# Altium PCB King Shape PCB.PcbDoc
Units mil, origin at the board's own origin, x right, y up, seen from the top; angles counter-clockwise.
Board outline 5273.33 x 2627.77 mil, 2 copper layers (Top Layer, Bottom Layer); 14 components, 8 nets, 33 pads, 11 vias.
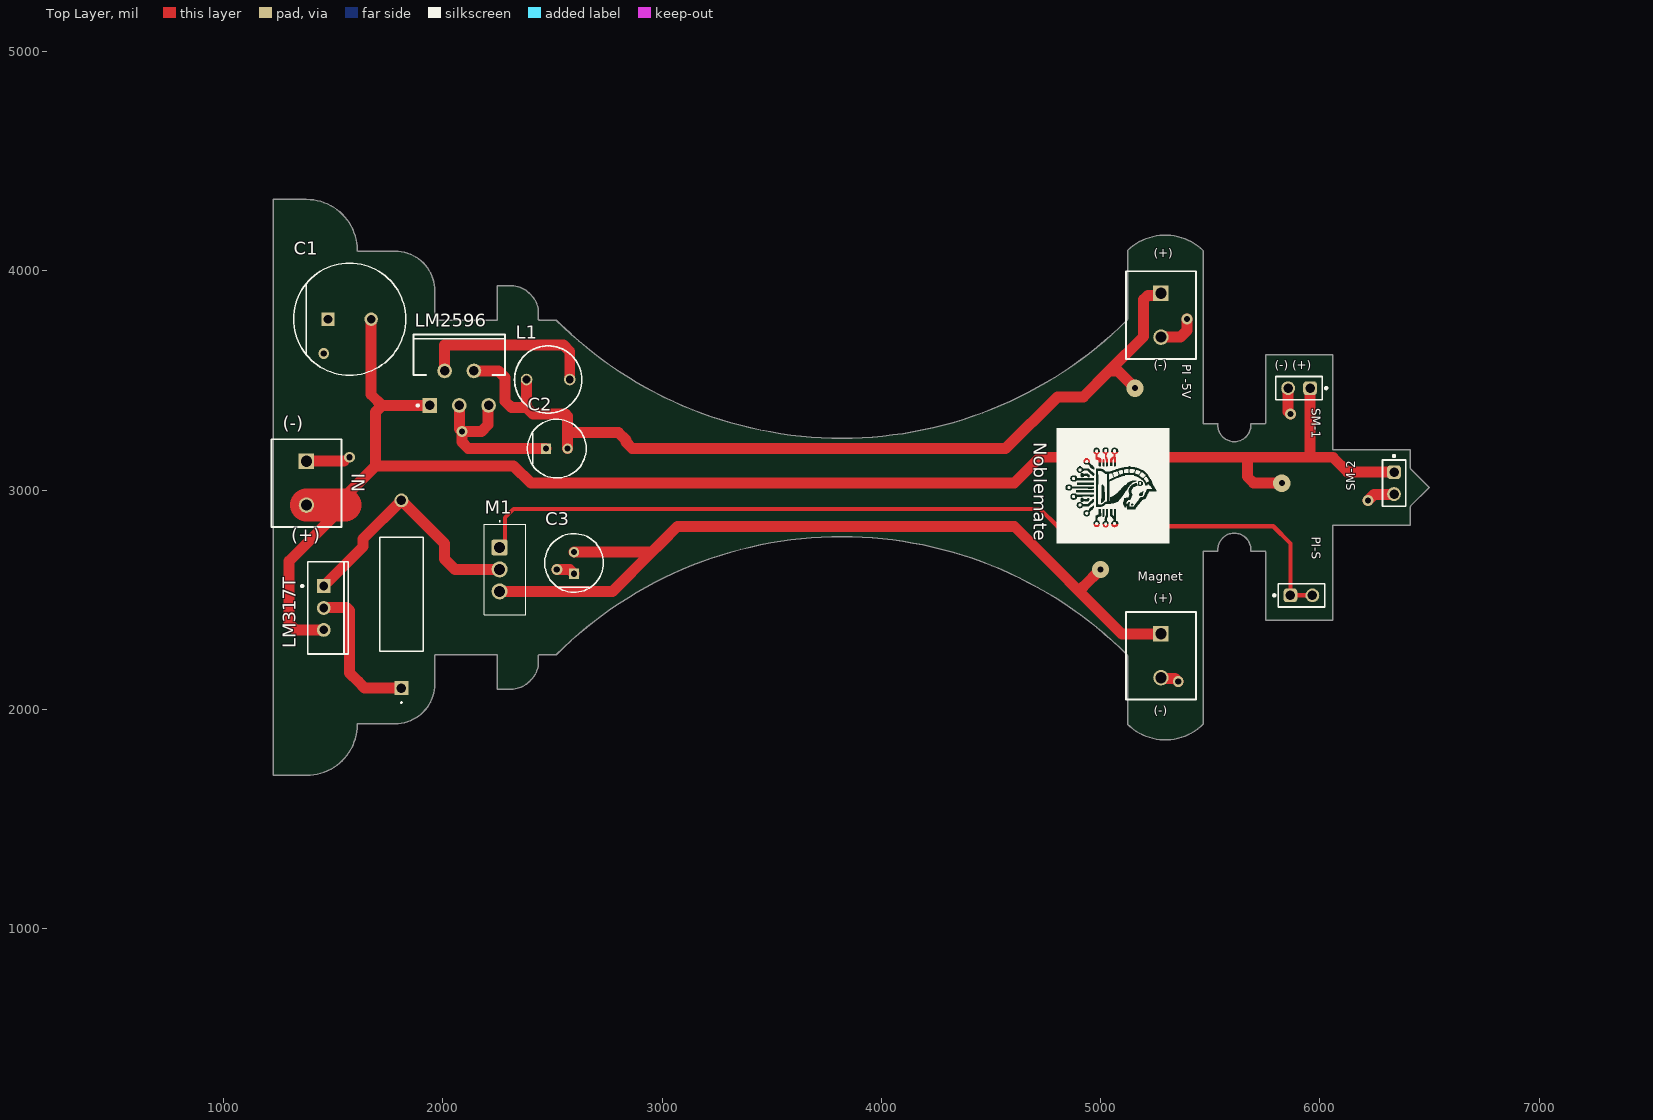
[diagram p0: Top Layer view]
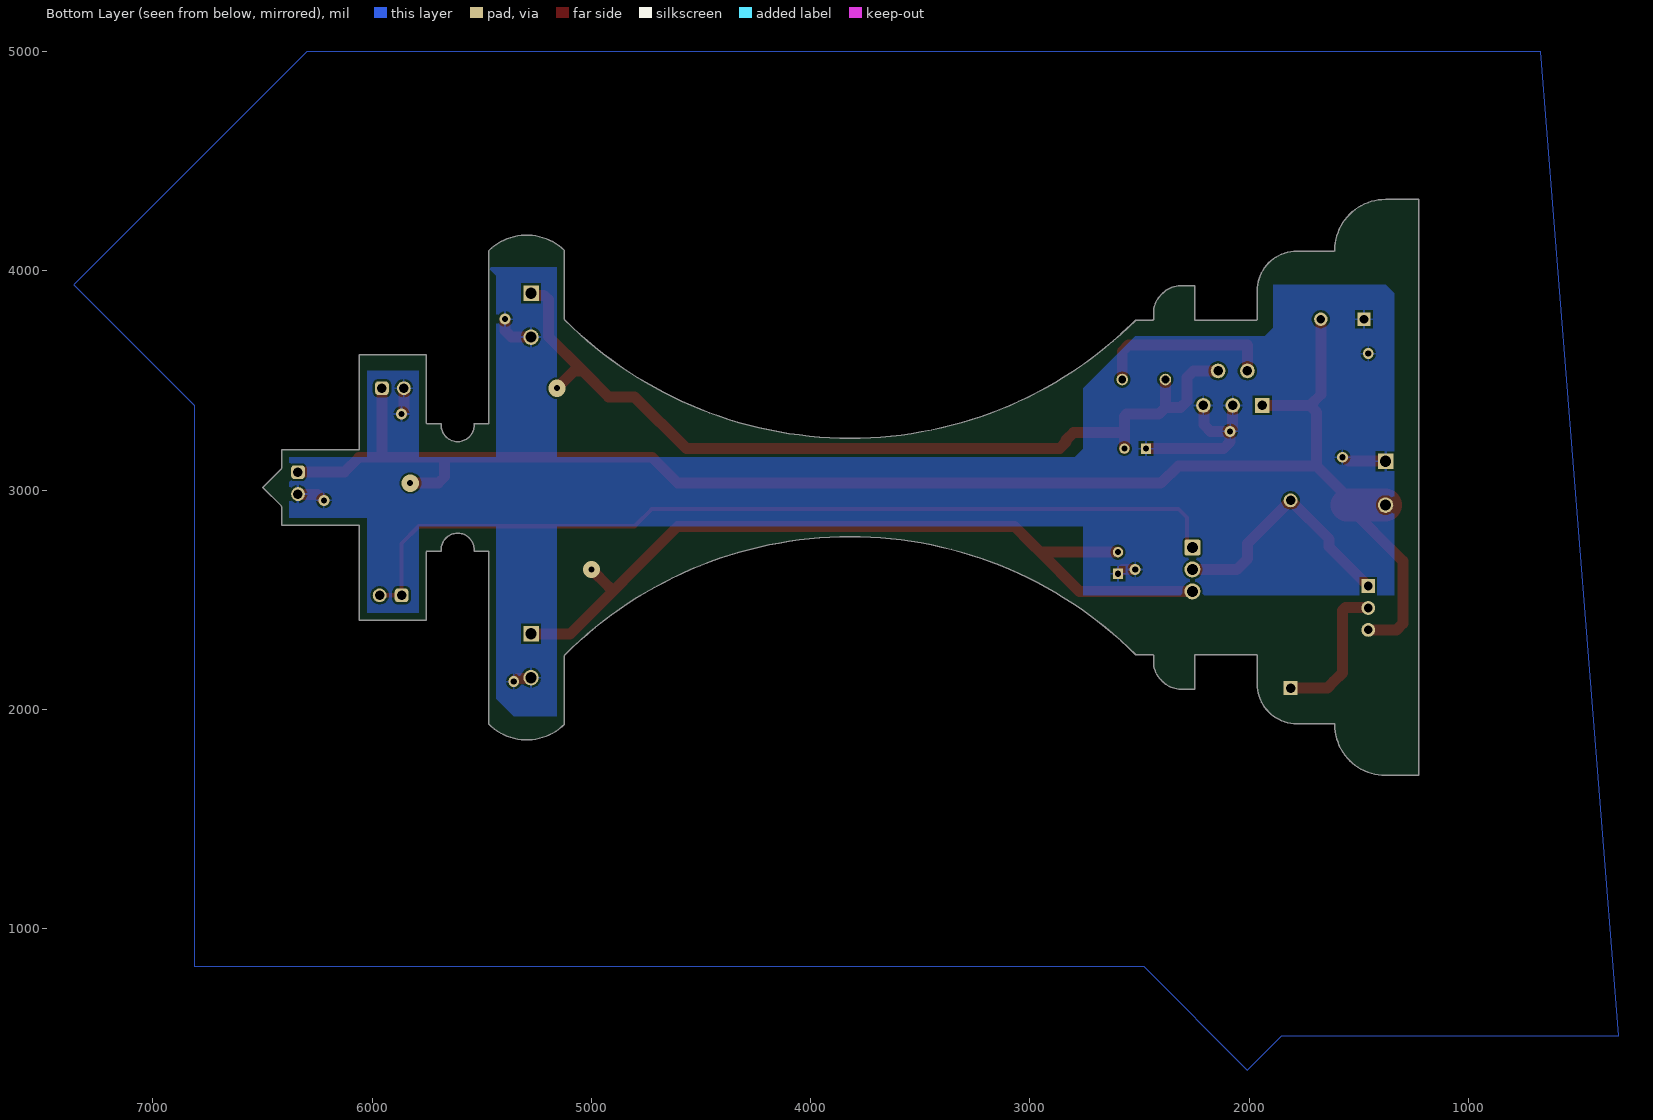
[diagram p1: Bottom Layer view, seen from below]
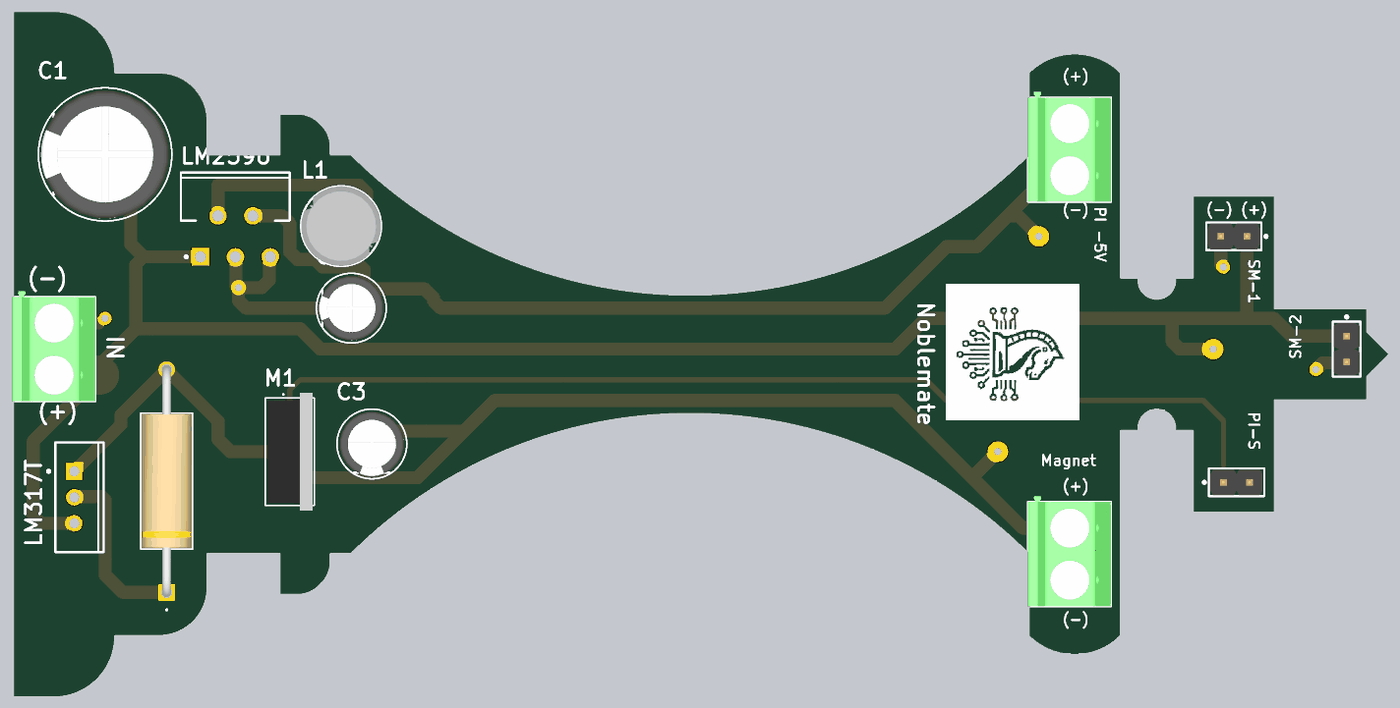
[diagram p2: 3D render of the assembled board from above, using the file's embedded part models]

## Layer stack, top to bottom
Top Solder: solder mask 0.4, Solder Resist, Dk 3.5
Top Layer: signal copper 1.4
Dielectric 1: dielectric 12.6, FR-4, Dk 4.8
Bottom Layer: signal copper 1.4
Bottom Solder: solder mask 0.4, Solder Resist, Dk 3.5

## Board outline
1377.95,1697.93 ccw(c1377.95,1929.13) 1609.16,1929.13 cw(c1614.17,1929.13) 1614.17,1934.15 1782.28,1934.15 ccw(c1782.28,2115.35) 1963.49,2115.35 1963.49,2244.09 cw(c1968.5,2244.09) 1968.5,2249.11 2244.09,2249.11 cw(c2244.09,2244.09) 2249.11,2244.09 2249.11,2091.63 2312.2,2091.63 ccw(c2312.2,2207.32) 2394.01,2125.52 2402.04,2133.55 ccw(c2320.23,2215.35) 2435.93,2215.35 2435.93,2244.09 cw(c2440.94,2244.09) 2440.94,2249.11 2517.61,2249.11 cw(c3818.9,944.88) 5121.66,2247.64 5123.13,2244.09 5123.13,1931.22 ccw(c5295.28,2106.3) 5467.43,1931.22 5467.43,2716.54 cw(c5472.44,2716.54) 5472.44,2721.55 5535.64,2721.55 cw(c5610.24,2728.22) 5685.13,2728.22 cw(c5610.24,2728.22) 5684.84,2721.55 5748.03,2721.55 cw(c5748.03,2716.54) 5753.05,2716.54 5753.05,2406.59 6057.98,2406.59 6057.98,2834.65 cw(c6062.99,2834.65) 6062.99,2839.66 6412.31,2839.66 6412.31,2923.23 6413.78,2926.77 6498.81,3011.81 6413.78,3096.85 6412.31,3100.39 6412.31,3183.96 6062.99,3183.96 cw(c6062.99,3188.98) 6057.98,3188.98 6057.98,3617.03 5753.05,3617.03 5753.05,3307.09 cw(c5748.03,3307.09) 5748.03,3302.07 5684.84,3302.07 cw(c5610.22,3295.4) 5685.13,3295.4 cw(c5610.24,3295.4) 5535.64,3302.07 5472.44,3302.07 cw(c5472.44,3307.09) 5467.43,3307.09 5467.43,4092.4 ccw(c5295.28,3917.32) 5123.13,4092.4 5123.13,3779.53 5121.66,3775.98 cw(c3818.9,5078.74) 2517.61,3774.51 2440.94,3774.51 cw(c2440.94,3779.53) 2435.93,3779.53 2435.93,3808.27 ccw(c2320.23,3808.27) 2402.04,3890.08 2394.01,3898.11 ccw(c2312.2,3816.3) 2312.2,3931.99 2249.11,3931.99 2249.11,3779.53 cw(c2244.09,3779.53) 2244.09,3774.51 1968.5,3774.51 cw(c1968.5,3779.53) 1963.49,3779.53 1963.49,3908.27 ccw(c1782.28,3908.27) 1782.28,4089.47 1614.17,4089.47 cw(c1614.17,4094.49) 1609.16,4094.49 ccw(c1377.95,4094.49) 1377.95,4325.69 1225.49,4325.69 1225.49,1697.93

## Design rules (kind name [scope] priority, off if disabled: settings)
Clearance [All] p1: gap=10 ignorepadtopadclearanceinfootprint=FALSE
PolygonConnect [All] p1: connectstyle=Relief reliefconductorwidth=10 reliefentries=4 polygonreliefangle="90 Angle" airgapwidth=10
RoutingVias [All] p1: holewidth=28 width=50 viastyle="Through Hole" minholewidth=28 minwidth=50 maxholewidth=28 maxwidth=50
SolderMaskExpansion [All] p1: expansion=4 istentingtop=FALSE
SupplyNets "Schematic Supply Nets" [InNet('GND')] p1: voltage=0.000
Width [InNet('NetC1_2')] p1: maxlimit=150 minlimit=29.92 preferedwidth=50
30 further rules are at their usual default settings.

## Components (designator, comment, footprint, x,y, rotation, side; value= is the part's Value field where it differs from the comment)
C1 "EEUFR1H681L" FP-RAD-TH-D_12_5_0_5-L_30-MFG 1574.8,3779.53 r0 top
C2 "EEUFR1E101B" FP-RAD-TH-D_6_3_0_5-L_11-MFG 2519.68,3188.98 r0 top
C3 "EEUFR1E101B" FP-RAD-TH-D_6_3_0_5-L_11-MFG 2598.43,2667.32 r90 top
IN "1729128" PHOE-1729128-2_V 1377.95,3031.5 r270 top (schematic designator HD6)
L1 "744772390" WE-TI-L 2480.32,3503.94 r180 top
LM317T "LM317T/NOPB" NDE0003A 1456.69,2462.2 r270 top
LM2596 "LM2596T-ADJ/NOPB" NDH0005A 2074.8,3464.57 r0 top
M1 "2SK2927-E" SIP444W76P254L1016H2199Q3_PRSS0004AC-A_N 2283.46,2637.8 r270 top
Magnet "1729128" PHOE-1729128-2_V 5275.59,2244.09 r270 top (schematic designator HD3)
"PI -5V" "1729128" PHOE-1729128-2_V 5275.59,3797.64 r270 top (schematic designator HD1)
PI-S "61300211121" 61300211121 5916.14,2519.68 r0 top (schematic designator HD2)
R1 "AC03000003008JAC00" RES_AC03_VIS 1811.02,2096.76 r90 top
SM-1 "61300211121" 61300211121 5905.51,3464.57 r180 top (schematic designator HD5)
SM-2 "61300211121" 61300211121 6338.58,3031.5 r270 top (schematic designator HD4)

## Footprints (in the part's own frame and the unit in brackets; to place one, negate y for a bottom-side part, rotate by r counter-clockwise, add the part's x,y. Pads: shape width x height; smd on the part's side, far side on the other; paste and mask are expansions set on the pad)
61300211121 [mm] "Pin Header, pitch 2.54 mm, THT, Vertical, single row, 2p"
  rrect50% 1.6x1.6 hole 1.1: 1(-1.27,0)
  round 1.6 hole 1.1: 2(1.27,0)
  silkscreen extent -3.26,-1.35 2.69,1.35, body extent -2.54,-1.27 2.54,1.27, height 8.57
FP-RAD-TH-D_6_3_0_5-L_11-MFG [mm]
  rect 1.2x1.2 hole 0.7 paste-2539.97 mask+0: 1(-1.25,0)
  round 1.2 hole 0.7 paste-2539.97 mask+0: 2(1.25,0)
  silkscreen extent -3.4,-3.4 3.4,3.4, body extent -3.5,-3.5 3.5,3.5, height 0.25
FP-RAD-TH-D_12_5_0_5-L_30-MFG [mm]
  rect 1.55x1.55 hole 1 paste-2539.97 mask+0: 1(-2.5,0)
  round 1.55 hole 1 paste-2539.97 mask+0: 2(2.5,0)
  silkscreen extent -6.5,-6.5 6.5,6.5, body extent -6.6,-6.6 6.6,6.6, height 0.25
NDE0003A [mm] "FM, 3-Leads, Body 10.7x4.7mm, Pitch 2.54mm"
  rect 1.6x1.6 hole 1: 1(-2.54,0)
  round 1.6 hole 1: 2(0,0) 3(2.54,0)
  silkscreen extent -5.35,-2.62 5.35,2.85, body extent -5.4,-1.9 5.4,2.9, height 19.4
NDH0005A [mm] "FM, 5-Leads, Body 10.6x4.7mm, Pitch 1.7mm"
  rect 1.7x1.7 hole 1.1: 1(-3.4,-2)
  round 1.7 hole 1.1: 2(-1.7,2) 3(0,-2) 4(1.7,2) 5(3.4,-2)
  silkscreen extent -5.3,-2.12 5.3,6.23, body extent -5.35,-2.31 5.35,6.28, height 21.1
PHOE-1729128-2_V [mm] "Receptacle, 2-Leads, Body 8.1x10.16mm, Pitch 5.08mm"
  rect 1.8x1.8 hole 1.3: 1(-2.54,0)
  round 1.8 hole 1.3: 2(2.54,0)
  silkscreen extent -5.08,-4.05 5.08,4.05, body extent -5.65,-4.05 5.08,4.05, height 10.01
RES_AC03_VIS [mil]
  rect 63x63 / inner round 60 / far side rect 63x63 hole 43 paste-99999 mask+0: 1(0,0)
  round 63 / inner round 60 / far side round 63 hole 43 paste-99999 mask+0: 2(856,0)
  silkscreen extent -69,-99 689,100, body extent -16,-95 873,95, height 189
SIP444W76P254L1016H2199Q3_PRSS0004AC-A_N [mm] "SIP, Body Width 4.44mm, Lead Width 0.76mm, Pitch 2.54mm, Body Length 10.16mm, Height 21.99mm, IPC Medium Density"
  rrect25% 1.85x1.85 hole 1.25: 1(-2.54,-0.63)
  round 1.85 hole 1.25: 2(0,-0.63) 3(2.54,-0.63)
  silkscreen extent -5.64,-2.38 5.24,2.38, body extent -5.43,-2.57 5.43,2.57, height 0.25
WE-TI-L [mm] "THT Inductor, 2-Leads, Body 7.8 x 7.8 mm"
  round 1.35 hole 0.9: 1(-2.5,0) 2(2.5,0)
  silkscreen extent -3.9,-3.9 3.9,3.9, body extent -3.9,-3.9 3.89,3.9, height 9.5

## Part data
C1: library part CMP-05427-000465-1, "Aluminum Electrolytic Capacitors (Radial Lead Type) 680uF ±20% 50V"
C2 C3: library part CMP-05427-000897-1, "Aluminum Electrolytic Capacitors (Radial Lead Type) 100uF ±20% 25V", Capacitance=100uF, Case/Package=Radial, ESR (Equivalent Series Resistance)=130mR, Max Operating Temperature=105°C, Min Operating Temperature=-40°C, Package Quantity=2000, Ripple Current=455mA, Tolerance=20%, Voltage Rating=25V, Diameter=6.3mm, Features="General Purpose", Height=11.2mm, Height - Seated (Max)=0.441inch, Impedance=130mR, Lead Diameter=0.5mm, Lead Free="Lead Free", Lead Pitch=5mm, Length=11.2mm, Life (Hours)=2000Hour, Mount="Through Hole", Packaging="Tape and Reel", Polarity=Polar, Radiation Hardening=No, RoHS Compliant=Yes, Series=FR, Termination=Radial, Voltage Rating (DC)=25V
IN Magnet "PI -5V": library part CMP-2000-05815-1, "PCB Terminal Block, 13.5 A, 400 V, 2-Pin THD, RoHS, Bulk", Current Rating=13500mA, Manufacturer="Phoenix Contact", Package Description="2-Pin Through Hole Device, Body 8.1 x 10.16 mm, Pitch 5.08 mm", Package Reference=1729128-2, Package Version=03/2015, Voltage Rating=400V, Datasheet URL=https://datasheet.ciiva.com/16046/1729128-16046181.pdf, Datasheet Version=12/2013, Manufacturer URL=http://www.phoenixcontact.com/, Mounting Technology=ThroughHole, No. of Positions=2, No. of Rows=1, Orientation=Horizontal, Package URL=https://www.phoenixcontact.com/online/portal/pi/pxc/product_detail_page/!ut/p/b1/3VdJjqNKFDxLH8AFycySyWY2ozFsEPOMMQaDOX1XedGL_1Vdm5YXJleknhSKeBkvI6EA8ncAo3AYoDhBQGco6KN7VURTdemj9us_IEKEZo_YHiPAEWEFmDGOHMORkqKYCORBZxgL7ZoaZYcbFFUZ3fqxSY6GOuxydWUuHqz1ynmMFygu583Bob0Ewr6Sd_l-5m-kAueHiB0jpRwZwe58wwtkpxtMYd_LmGcDRU02dRNEyWt6Y2ti5pSyJ_reIkzIulrqApdnbT11V5jnCKbYNCvhEM1MCpPByat_X379-iThf08CI5GfOPqfBeS3BRoBOdD55AKVv0iLwCMq-2BrzXWSGRH7pUGD9uwXQjiph3xL0DKQwdGa0JImiIOmBNOestqgwTHSSs2oOep-78apyXQBvNi8ZLaFjvjWvcaUEBu0MC6Wbe-d6mB0FAebo2lUWinqYaZs5DAYzV0RP9yitUjnGJ0iI9xhZkT42OCQNUJJhkgWINNQLP2JFP6OpMg3JCVg70jqHT0lvKOnhHf0lPuOnnLf0VPuWx6_dxwUIvwk5WMkT0kLL1mh61l2yZVSzG3pYV_bqo-mj6uMKwKwdnnW8Jh5RTOJzMOA5c-eJDaZQw4mTMPH02PvS_ZAqNVjVTo2WyYLkwH_KU1mmmG5kjRhDqPXLwwVHvVOjCM60-fpXvTDfMGW1PVFVS1r4e4yVDk4ZdNbkUHvqPqQSeian4UD39fNKmachqdJ1NJbyk8rXT9mXTvPk3oE5meulKGgiruPJek-4I9hTT6G8ZLOyRSm2RRVbThERQad5OS28hdt4YW4vG0stgYYzsWsK4_7y6DZMjJSCqri1kyiZR5vD7pwIrNR7QwPHTcLTI5qT7eRlpHrdGiupYlqQDJ7zy_CND8fWWBoLRXxk1RVcXiBQwbTD4Xi7KL-FuO94t9xaqweXzH, Packing=Bulk, PartNumber=1729128, Pitch=5.08mm, RoHS=TRUE
L1: library part CMP-0225-00043-1, "Radial Leaded Wire Wound Inductor WE-TI, L = 39.0 µH", Inductance="39.0 ÂµH", ComponentLink1Description="Manufacturer Link", ComponentLink1URL=http://www.we-online.com, ComponentLink2Description=Datasheet, ComponentLink2URL=http://www.we-online.de/katalog/media/pdf/744772390.pdf, DatasheetVersion="ver 8, Oct-2009", PackageDescription="THT Inductor, 2-Leads, Body 7.8 x 7.8 mm", PackageReference=WE-TI-L, PackageVersion=2006
LM317T: library part CMP-0062-02455-3, "3-Terminal Adjustable Regulator, 3-pin TO-220, Pb-Free", Manufacturer="Texas Instruments", PackageTopMarking="NSUZXYTTE#*LM317T P+", PowerWise=N, ComponentLink1Description="Datasheet URL", ComponentLink1URL=http://www.ti.com/general/docs/lit/getliterature.tsp?genericPartNumber=LM317-N&fileType=pdf, CompType="LDO IC", PackageDescription="TO-220, Molded, 3 Lead, Straight", PackageReference=NDE0003A, PinCount=3, RoHS=Y
LM2596: library part CMP-0069-01928-3, "SIMPLE SWITCHER® Power Converter 150 KHz 3A Step-Down Voltage Regulator, 5-pin TO-220, Pb-Free", Manufacturer="Texas Instruments", PackageTopMarking="NSUZXYTTE#*LM2596T*-ADJ P+", PowerWise=N, ComponentLink1Description="Datasheet URL", ComponentLink1URL=http://www.ti.com/general/docs/lit/getliterature.tsp?genericPartNumber=LM2596&fileType=pdf, CompType=Switcher, PackageDescription="TO-220, Molded, Stagger Bend, 5 Lead", PackageReference=NDH0005A, PinCount=5, RoHS=Y
M1: library part CMP-00572-23028033-1, "Trans MOSFET N-CH Si 60V 10A 3-Pin(3+Tab) TO-220AB Tube", Case/Package=TO-220AB, Continuous Drain Current (ID)=10A, Drain to Source Voltage (Vdss)=60V, Gate to Source Voltage (Vgs)=20V, Manufacturer Lifecycle Status="NOT RECOMMENDED FOR NEW DESIGNS", Max Operating Temperature=150°C, Min Operating Temperature=-55°C, Power Dissipation=30W, China RoHS=Compliant, ComponentLink1Description="Manufacturer's Website", ComponentLink1URL=http://www.renesas.com, ComponentLink2Description="Datasheet URL", ComponentLink2URL=https://octopart.com/cad-content/api/get-model-datasheet/15189/23028033, ComponentLink3Description="Manufacturer's Package Drawing", ComponentLink3URL=https://www.renesas.com/en/document/psc/package-drawing-220ab-4pin-prss0004ac, Fall Time=70ns, Height=4.64mm, HelpURL=https://octopart.com/cad-content/api/get-model-datasheet/15189/23028033, Lead Free="Lead Free", Lifecycle Status=NRND, Mount="Through Hole", Number of Elements=1, Number of Pins=3, Radiation Hardening=No, Rds On Max=75mΩ, Rise Time=55ns, RoHS=Compliant, Turn-Off Delay Time=60ns, Turn-On Delay Time=10ns
PI-S SM-1 SM-2: library part CMP-1712-00002-6, Color=Black, Contact Resistance=20mΩ, Current Rating=3A, Max Operating Temperature=125°C, Min Operating Temperature=-40°C, Operating Supply Voltage=250V, Connector Type="Male Pin", Contact Gender=Male, Contact Material=Copper, Contact Mating Length=5.9944mm, Contact Plating=Gold, Gender=Male, Height=8.94mm, Housing Material=PBT, Lead Free="Lead Free", Lead Pitch=2.54mm, Mount="Through Hole", NexarPartId=20081794, Number of Contacts=2, Number of Pins=2, Number of Positions=2, Number of Rows=1, Orientation=Vertical, Packaging=Bulk, Pitch=2.54mm, REACH SVHC="No SVHC", RoHS=Compliant, Termination="Through Hole", Voltage Rating=250V
R1: library part CMP-00030-39747180-1, "AC03000003008JAC00 Resistor, 3 Ohm, ± 5%, 3 W, Axial Leaded, Wirewound, General Purpose", Case/Package=Axial, Max Operating Temperature=275°C, Max Power Dissipation=3W, Min Operating Temperature=-40°C, Resistance=3Ω, Temperature Coefficient=-80ppm/°C, Tolerance=5%, Voltage Rating=3V, Composition=Wirewound, Contact Plating=Tin, Diameter=4.8mm, Features="Flame Retardant Coating", Lead Diameter=800µm, Length=13mm, NexarPartId=39747180, Number of Pins=2, Number of Terminations=2, Packaging="Tape & Box (TB)", Power Rating=3W, Radiation Hardening=No, REACH SVHC=Unknown, RoHS=Compliant, Schedule B="8533210080, 8533210080", Termination=Axial, Thickness=4.8006mm, Voltage Rating (DC)=3V, Width=4.8mm

## Via types
v1: diameter 50, hole 28, Top Layer to Bottom Layer, 8 vias
v2: diameter 78.74, hole 28, Top Layer to Bottom Layer, 3 vias

## Nets (pads, with @x,y where several pads share a name; then routed paths per layer and width w, separated by ;. In a path a pad name is that pad's centre, name@x,y a point inside that pad or via, vN(x,y) a via of type N, cw(c..) or ccw(c..) an arc to the next point about the centre after c; other vN are vias at no path point)
GND: "PI -5V.2" C1.1 C2.1 C3.1 IN.1 LM2596.3 LM2596.5 Magnet.2 SM-1.2 SM-2.2 | length 1627.8
  Top Layer w19.68: 1548.49,3131.5 1566.6,3149.61 v1(1574.8,3149.61)
  Top Layer w50: IN.1 1548.49,3131.5 ; LM2596.3 2076.97,3383.66 2076.97,3277.36 v1(2086.61,3267.72) ; LM2596.5@2204.08,3385.83 LM2596.5 2205.42,3382.59 2205.42,3297.7 2175.43,3267.72 v1(2086.61,3267.72) ; C2.1 2115.9,3188.98 2086.61,3218.27 v1(2086.61,3267.72) ; v1(2519.68,2637.8) 2578.74,2637.8 C3.1 ; Magnet.2 5279.58,2140.1 5340.21,2140.1 v1(5354.33,2125.98) ; 5275.59,3697.64 5364.41,3697.64 5393.7,3726.93 v1(5393.7,3779.53) v1@5393.7,3758.27 ; SM-1.2 5855.51,3357.09 v1(5866.14,3346.46) ; v1(6220.47,2952.76) 6246.73,2979.01 6336.1,2979.01 SM-2.2
  other v1: 1456.69,3622.05
NetC1_2: C1.2 IN.2 LM317T.3 LM2596.1 SM-1.1 SM-2.1 | length 7492.6
  Top Layer w50: LM317T.3 1328.5,2362.2 1299.21,2391.49 1299.21,2677.17 1553.54,2931.5 ; 1514.17,2931.5 1692.91,3110.24 ; C1.2 1673.23,3434.8 1722.2,3385.83 ; LM2596.1 1722.2,3385.83 ; v2(5826.77,3031.5) 5698.58,3031.5 5669.29,3060.79 5669.29,3149.61 ; SM-1.1 5955.51,3149.61 ; SM-2.1 6127.36,3081.5 6059.25,3149.61 5955.51,3149.61 ; 1692.91,3110.24 1692.91,3356.54 1722.2,3385.83 ; 1692.91,3110.24 2322.83,3110.24 2401.57,3031.5 4606.3,3031.5 4724.41,3149.61 5669.29,3149.61 ; 5669.29,3149.61 5955.51,3149.61
  Top Layer w150: IN.2 1553.54,2931.5
NetC2_2: "PI -5V.1" C2.2 L1.2 LM2596.4 | length 4148.9
  Top Layer w50: LM2596.4 2254.18,3543.31 2283.46,3514.02 2283.46,3405.04 2312.75,3375.75 2381.89,3375.75 ; L1.2 2381.89,3375.75 ; C2.2 2568.9,3262.8 ; v2(5157.48,3464.57) 5078.74,3543.31 5039.37,3543.31 ; 5267.56,3897.64 5275.24,3889.96 ; 5275.59,3897.64 5265.16,3887.2 5215.71,3887.2 5196.85,3868.35 5196.85,3700.79 5039.37,3543.31 ; 2381.89,3375.75 2411.18,3346.46 2559.06,3346.46 2568.9,3336.61 2568.9,3262.8 ; 2568.9,3262.8 2800.2,3262.8 2834.65,3228.35 2834.65,3218.27 2863.94,3188.98 4566.93,3188.98 4803.15,3425.2 4921.26,3425.2 5039.37,3543.31
NetC3_2: C3.2 M1.3 Magnet.1 | length 3808.8
  Top Layer w50: M1.3 2774.02,2537.8 2952.76,2716.54 ; C3.2 2952.76,2716.54 ; 4921.26,2559.06 v2(5000,2637.8) ; Magnet.1 5096.85,2344.09 4606.3,2834.65 3070.87,2834.65 2992.13,2755.91 2952.76,2716.54
NetHD2_1: M1.1 PI-S.1 PI-S.2 | length 4146.9
  Top Layer w19.68: M1.1 2283.46,2762.6 2283.46,2874.02 2322.83,2913.39 4724.41,2913.39 4803.15,2834.65 5787.4,2834.65 5866.14,2755.91 PI-S.1 PI-S.2
NetL1_1: L1.1 LM2596.2 | length 829.3
  Top Layer w50: LM2596.2 2007.87,3661.42 2549.45,3661.42 2578.74,3632.13 L1.1
NetLM317T_1: LM317T.1 M1.2 R1.2 | length 1156.8
  Top Layer w50: LM317T.1 1635.86,2741.37 1635.86,2777.59 R1.2 2007.87,2755.91 2007.87,2685.19 2055.27,2637.8 M1.2
NetLM317T_2: LM317T.2 R1.1 | length 675.1
  Top Layer w50: LM317T.2 1459.18,2464.69 1561.14,2464.69 1574.8,2451.03 1574.8,2165.35 1614.23,2125.93 1643.4,2096.76 R1.1

## Polygon pours and split planes (outlines as drawn)
GND on Bottom Layer "GND" (solid, pour order 9): 6023.62,3543.31 6023.62,2440.94 5787.4,2440.94 5787.4,3543.31
GND on Bottom Layer "GND" (solid, pour order 7): 5157.48,4015.75 5472.44,4015.75 5433.07,3976.38 5433.07,2047.24 5354.33,1968.5 5157.48,1968.5 5157.48,2716.54
GND on Bottom Layer "GND" (solid, pour order 6): 1889.76,3937.01 1889.76,3740.16 1929.13,3700.79 2519.69,3700.79 2755.91,3464.57 2755.91,2519.68 1338.58,2519.68 1338.58,2559.06 1338.58,3897.64 1377.95,3937.01 1338.58,3897.64 1377.95,3937.01
GND on Bottom Layer "GND_L02_P011" (solid, pour order 11): 5984.25,3149.61 2795.28,3149.61 2716.54,3228.35 2677.17,3188.98 2677.17,2834.65 5944.88,2834.65 5984.25,2874.02
GND on Bottom Layer "GND_L02_P010" (solid, pour order 10): 6377.95,3149.61 6377.95,2874.02 5984.25,2874.02 5984.25,3149.61
no net on Bottom Layer "NONET_L02_P000" (solid, shelved, pour order 0): 669.29,5000 6299.21,5000 7362.2,3937.01 6811.02,3385.83 6811.02,826.77 2480.32,826.77 2007.87,354.33 1850.39,511.81 314.96,511.81

## Silkscreen, mask and mechanical layers (free items; w line width, h text height)
Top Overlay:
  drawing of 24 lines, arcs and shapes, not listed
  text "(+)" at 5243.22,4062.12 h40
  text "(-)" at 5243.22,3550.31 h40
  text "(-) (+)" at 5794.4,3550.31 h40
  text "(-)" at 1269.84,3277.72 h60
  text "Noblemate" at 4695.04,3218.35 h60 r270
  text "(+)" at 1309.21,2765.91 h60
  text "(+)" at 5243.22,2487.32 h40
  text "(-)" at 5243.22,1975.5 h40
Mechanical 1:
  lines w10: 1968.5,2125.98 1968.5,2115.35 ; 1968.5,3897.64 1968.5,3908.27 ; 5472.44,2480.31 5472.44,1929.13 cw(c5295.28,2106.3) 5118.11,1929.13 5118.11,2244.09 ccw(c3818.9,944.88) 2519.69,2244.09 2440.94,2244.09 2440.94,2215.35 cw(c2320.23,2215.35) 2405.59,2130 2390.04,2114.45 cw(c2322.83,2181.66) 2322.83,2086.61 2312.2,2086.61 2244.09,2086.61 2244.09,2244.09 1968.5,2244.09 1968.5,2115.35 ; 5472.44,3543.31 5472.44,4094.49 ccw(c5295.28,3917.32) 5118.11,4094.49 5118.11,3779.53 cw(c3818.9,5078.74) 2519.68,3779.53 2440.94,3779.53 2440.94,3808.27 ccw(c2320.23,3808.27) 2405.59,3893.62 2397.56,3901.65 ccw(c2312.2,3816.3) 2312.2,3937.01 2244.09,3937.01 2244.09,3779.53 1968.5,3779.53 1968.5,3908.27 ; 6062.99,2834.65 6417.32,2834.65 6417.32,2923.23 6505.91,3011.81 6417.32,3100.39 6417.32,3188.98 6062.99,3188.98 ; 1968.5,2115.35 cw(c1782.28,2115.35) 1782.28,1929.13 1614.17,1929.13 cw(c1377.95,1929.13) 1377.95,1692.91 1220.47,1692.91 1220.47,4330.71 1377.95,4330.71 cw(c1377.95,4094.49) 1614.17,4094.49 1782.28,4094.49 cw(c1782.28,3908.27) 1968.5,3908.27